# Altium PCB CAM_SEN_V100.PcbDoc
Units mm, origin at the board's own origin, x right, y up, seen from the top; angles counter-clockwise.
Board outline 28.5 x 47.5 mm, 2 copper layers (Top Layer, Bottom Layer); 74 components, 38 nets, 500 pads, 0 vias.
Unrouted connection lines stored in the file: 374.
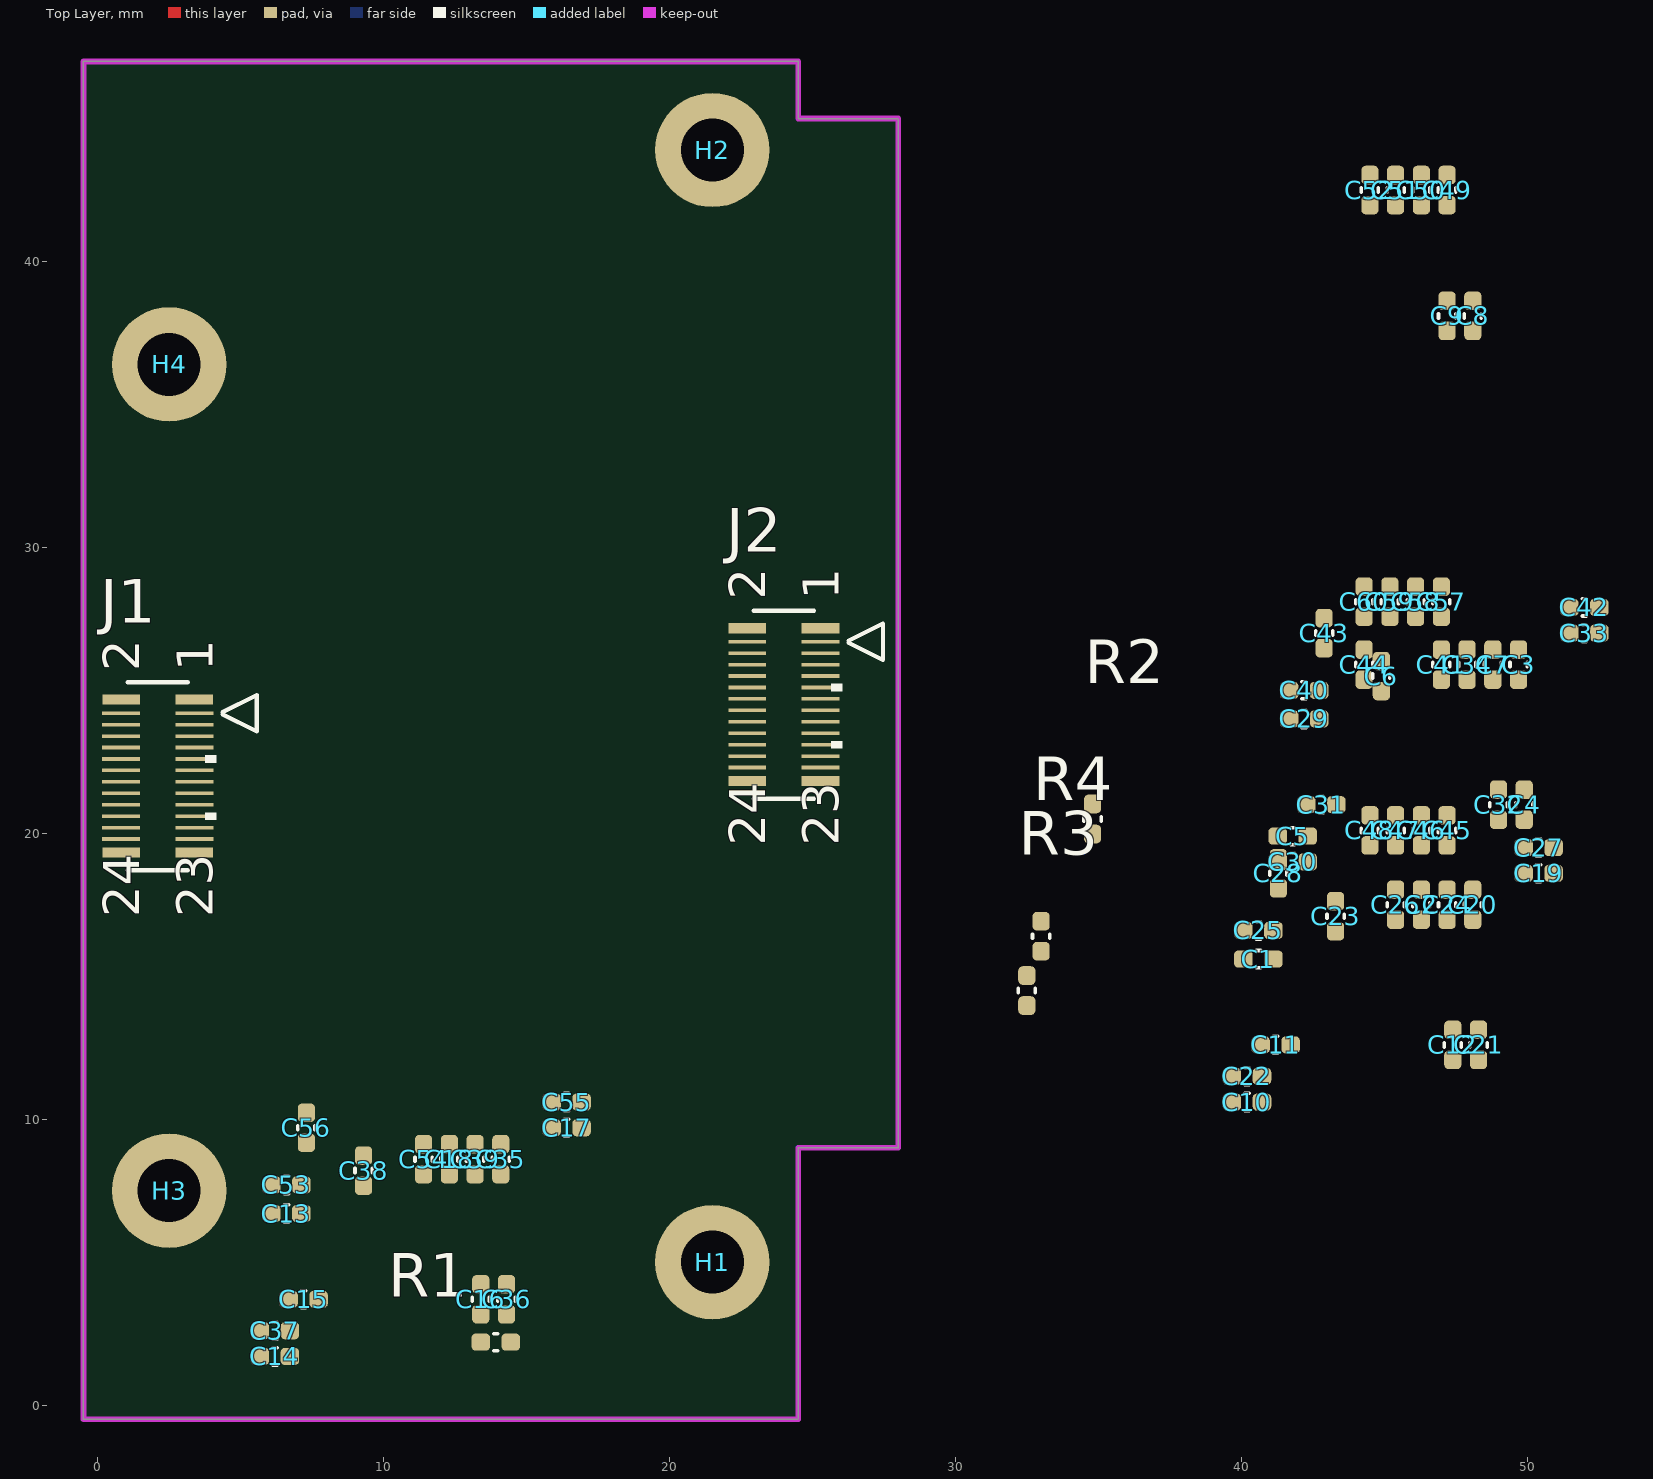
[diagram p0: Top Layer view]
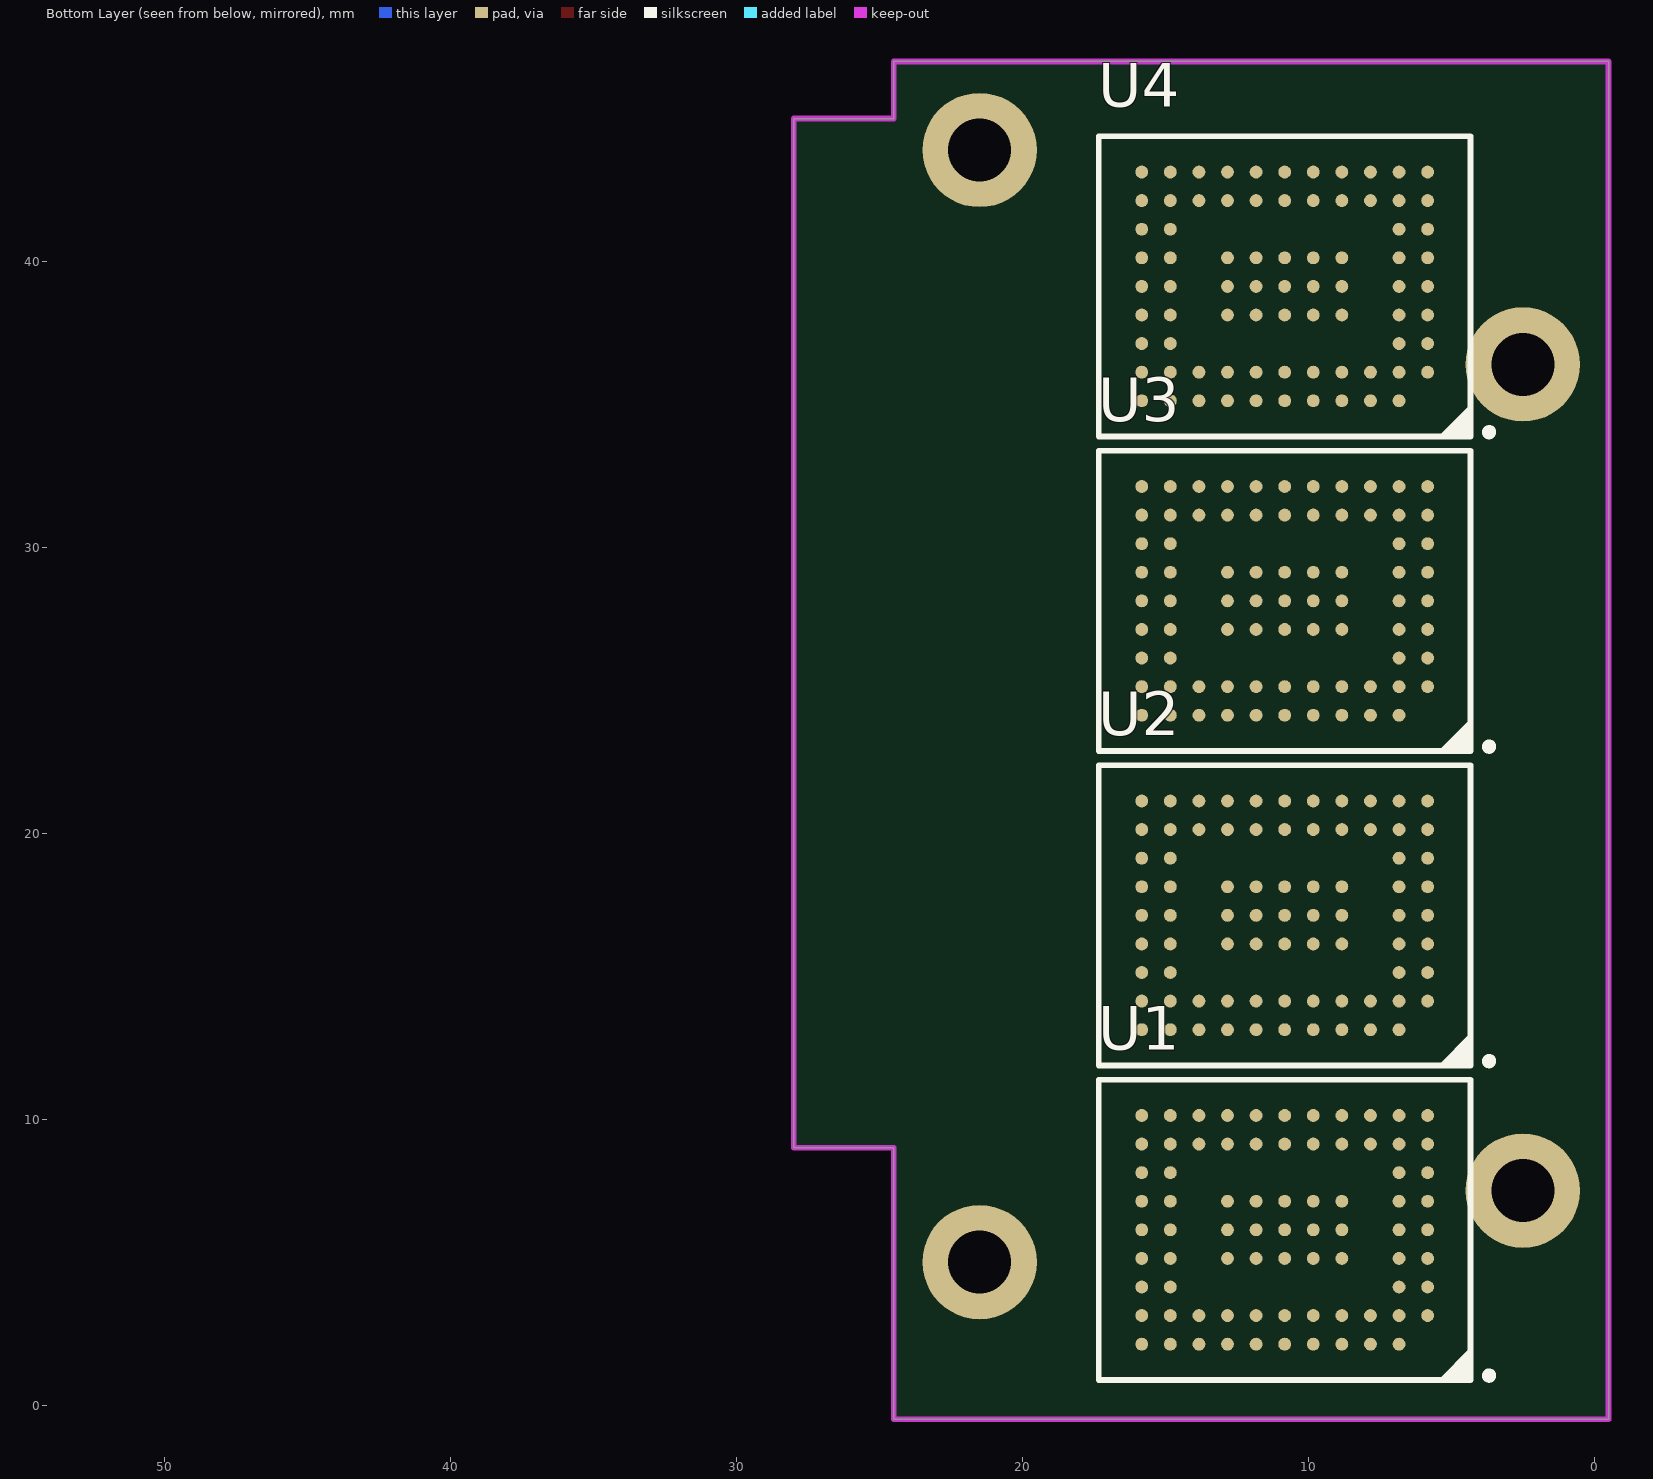
[diagram p1: Bottom Layer view, seen from below]

## Layer stack, top to bottom
Top Solder: solder mask 0.0102, Solder Resist, Dk 3.5
Top Layer: signal copper 0.0356
Dielectric 1: dielectric 0.32, FR-4, Dk 4.8
Bottom Layer: signal copper 0.0356
Bottom Solder: solder mask 0.0102, Solder Resist, Dk 3.5

## Board outline
-0.5,-0.5 -0.5,47 24.5,47 24.5,45 28,45 28,9 24.5,9 24.5,-0.5

## Design rules (kind name [scope] priority, off if disabled: settings)
Clearance [All] p1: gap=0.15 ignorepadtopadclearanceinfootprint=FALSE
DiffPairsRouting [All] p1: maxlimit=0.254 minlimit=0.254 mostfreqgap=0.254 toplayer_minwidth=0.381 toplayer_maxwidth=0.381 toplayer_prefwidth=0.381 bottomlayer_minwidth=0.381 bottomlayer_maxwidth=0.381 bottomlayer_prefwidth=0.381 maxuncoupledlength=12.7
PolygonConnect [All] p1: connectstyle=Relief reliefconductorwidth=0.254 reliefentries=4 polygonreliefangle="90 Angle" airgapwidth=0.254
RoutingVias [All] p1: holewidth=0.711 width=1.27 viastyle="Through Hole" minholewidth=0.711 minwidth=1.27 maxholewidth=0.711 maxwidth=1.27
SolderMaskExpansion [All] p1: expansion=0.102 istentingtop=FALSE
SupplyNets "Schematic Supply Nets_6" [InNet('GND')] p1: voltage=0.000
SupplyNets "Schematic Supply Nets_5" [InNet('+1.05V')] p2: voltage=0.000
SupplyNets "Schematic Supply Nets_3" [InNet('+1.8V')] p3: voltage=0.000
SupplyNets "Schematic Supply Nets_1" [InNet('+2.8V')] p4: voltage=0.000
Width [All] p1: maxlimit=0.254 minlimit=0.254 preferedwidth=0.254
29 further rules are at their usual default settings.

## Classes and differential pairs
net class DIFF100: CAM_CK_N CAM_CK_P CAM_D0_N CAM_D0_P CAM_D1_N CAM_D1_P
component class POWER: C1 C2 C3 C4 C5 C6 C7 C8 C9 C10 C11 C12 C13 C14 C15 C16 C17 C18 C19 C20 C21 C22 C23 C24 C25 C26 C28 C30 C32 C34 C35 C36 C37 C38 C39 C40 C41 C42 C43 C44 C47 C49 C50 C51 C52 C53 C54 C55 C56 C57 C58 C59 H1 H2 H3 H4 J1 J2 R1 R2 R3 R4 U1 U2 U3 U4
differential pair CAM_D1: +CAM_D1_P -CAM_D1_N
differential pair CAM_D0: +CAM_D0_P -CAM_D0_N
differential pair CAM_CK: +CAM_CK_P -CAM_CK_N

## Components (designator, comment, footprint, x,y, rotation, side; value= is the part's Value field where it differs from the comment)
C1 "2.2uF/6.3V" CAP_C_1005X60 40.6,15.6 r180 top value=33pF
C2 "2.2uF/6.3V" CAP_C_1005X60 46.3,17.5 r90 top value=33pF
C3 "2.2uF/6.3V" CAP_C_1005X60 49.7,25.9 r90 top value=33pF
C4 "2.2uF/6.3V" CAP_C_1005X60 49.9,21 r270 top value=33pF
C5 "2.2uF/6.3V" CAP_C_1005X60 41.8,19.9 r0 top value=33pF
C6 "0.22uF/16V" CAP_C_1005X60 44.9,25.5 r90 top value=33pF
C7 "2.2uF/6.3V" CAP_C_1005X60 48.8,25.9 r90 top value=33pF
C8 "2.2uF/6.3V" CAP_C_1005X60 48.1,38.1 r90 top value=33pF
C9 "2.2uF/6.3V" CAP_C_1005X60 47.2,38.1 r90 top value=33pF
C10 "2.2uF/6.3V" CAP_C_1005X60 40.2,10.6 r0 top value=33pF
C11 "2.2uF/6.3V" CAP_C_1005X60 41.2,12.6 r0 top value=33pF
C12 "0.22uF/16V" CAP_C_1005X60 47.4,12.6 r270 top value=33pF
C13 "2.2uF/6.3V" CAP_C_1005X60 6.6,6.7 r180 top value=33pF
C14 "2.2uF/6.3V" CAP_C_1005X60 6.2,1.7 r0 top value=33pF
C15 "2.2uF/6.3V" CAP_C_1005X60 7.2,3.7 r0 top value=33pF
C16 "2.2uF/6.3V" CAP_C_1005X60 13.4,3.7 r270 top value=33pF
C17 "2.2uF/6.3V" CAP_C_1005X60 16.4,9.7 r180 top value=33pF
C18 "0.22uF/16V" CAP_C_1005X60 12.3,8.6 r90 top value=33pF
C19 "2.2uF/6.3V" CAP_C_1005X60 50.4,18.6 r180 top value=33pF
C20 "2.2uF/6.3V" CAP_C_1005X60 48.1,17.5 r90 top value=33pF
C21 "2.2uF/6.3V" CAP_C_1005X60 48.3,12.6 r270 top value=33pF
C22 "2.2uF/6.3V" CAP_C_1005X60 40.2,11.5 r0 top value=33pF
C23 "2.2uF/6.3V" CAP_C_1005X60 43.3,17.1 r90 top value=33pF
C24 "0.22uF/16V" CAP_C_1005X60 47.2,17.5 r90 top value=33pF
C25 "2.2uF/6.3V" CAP_C_1005X60 40.6,16.6 r180 top value=33pF
C26 "2.2uF/6.3V" CAP_C_1005X60 45.4,17.5 r90 top value=33pF
C27 "2.2uF/6.3V" CAP_C_1005X60 50.4,19.5 r180 top value=33pF
C28 "2.2uF/6.3V" CAP_C_1005X60 41.3,18.6 r90 top value=33pF
C29 "0.22uF/16V" CAP_C_1005X60 42.2,24 r180 top value=33pF
C30 "2.2uF/6.3V" CAP_C_1005X60 41.8,19 r0 top value=33pF
C31 "2.2uF/6.3V" CAP_C_1005X60 42.8,21 r0 top value=33pF
C32 "2.2uF/6.3V" CAP_C_1005X60 49,21 r270 top value=33pF
C33 "2.2uF/6.3V" CAP_C_1005X60 52,27 r180 top value=33pF
C34 "0.22uF/16V" CAP_C_1005X60 47.9,25.9 r90 top value=33pF
C35 "2.2uF/6.3V" CAP_C_1005X60 14.1,8.6 r90 top value=33pF
C36 "2.2uF/6.3V" CAP_C_1005X60 14.3,3.7 r270 top value=33pF
C37 "2.2uF/6.3V" CAP_C_1005X60 6.2,2.6 r0 top value=33pF
C38 "2.2uF/6.3V" CAP_C_1005X60 9.3,8.2 r90 top value=33pF
C39 "0.22uF/16V" CAP_C_1005X60 13.2,8.6 r90 top value=33pF
C40 "2.2uF/6.3V" CAP_C_1005X60 42.2,25 r180 top value=33pF
C41 "2.2uF/6.3V" CAP_C_1005X60 47,25.9 r90 top value=33pF
C42 "2.2uF/6.3V" CAP_C_1005X60 52,27.9 r180 top value=33pF
C43 "2.2uF/6.3V" CAP_C_1005X60 42.9,27 r90 top value=33pF
C44 "0.22uF/16V" CAP_C_1005X60 44.3,25.9 r90 top value=33pF
C45 "2.2uF/6.3V" CAP_C_1005X60 47.2,20.1 r90 top value=33pF
C46 "2.2uF/6.3V" CAP_C_1005X60 46.3,20.1 r90 top value=33pF
C47 "2.2uF/6.3V" CAP_C_1005X60 45.4,20.1 r90 top value=33pF
C48 "0.22uF/16V" CAP_C_1005X60 44.5,20.1 r90 top value=33pF
C49 "2.2uF/6.3V" CAP_C_1005X60 47.2,42.5 r90 top value=33pF
C50 "2.2uF/6.3V" CAP_C_1005X60 46.3,42.5 r90 top value=33pF
C51 "2.2uF/6.3V" CAP_C_1005X60 45.4,42.5 r90 top value=33pF
C52 "0.22uF/16V" CAP_C_1005X60 44.5,42.5 r90 top value=33pF
C53 "2.2uF/6.3V" CAP_C_1005X60 6.6,7.7 r180 top value=33pF
C54 "2.2uF/6.3V" CAP_C_1005X60 11.4,8.6 r90 top value=33pF
C55 "2.2uF/6.3V" CAP_C_1005X60 16.4,10.6 r180 top value=33pF
C56 "0.22uF/16V" CAP_C_1005X60 7.3,9.7 r90 top value=33pF
C57 "2.2uF/6.3V" CAP_C_1005X60 47,28.1 r90 top value=33pF
C58 "2.2uF/6.3V" CAP_C_1005X60 46.1,28.1 r90 top value=33pF
C59 "2.2uF/6.3V" CAP_C_1005X60 45.2,28.1 r90 top value=33pF
C60 "0.22uF/16V" CAP_C_1005X60 44.3,28.1 r90 top value=33pF
H1 "M2" HEX-2.2mm 21.5,5 r0 top locked
H2 "M2" HEX-2.2mm 21.5,43.9 r0 top locked
H3 "M2" HEX-2.2mm 2.5,7.5 r0 top locked
H4 "M2" HEX-2.2mm 2.5,36.4 r0 top locked
J1 "DF40C-24DP-0.4V51" CONN24_6p32X1p85_hdr_HIR 2.1,22 r90 top
J2 "DF40C-24DP-0.4V51" CONN24_6p32X1p85_hdr_HIR 24,24.5 r90 top
R1 "4.7k" RES_C_1005X40 13.925,2.2 r180 top
R2 "4.7k" RES_C_1005X40 34.8,20.5 r90 top
R3 "4.7k" RES_C_1005X40 32.5,14.5 r90 top
R4 "4.7k" RES_C_1005X40 33,16.4 r90 top
U1 "AR2020" BGA78C100P11X9_1300X1050X210 10.83,6.13 r0 bottom locked
U2 "AR2020" BGA78C100P11X9_1300X1050X210 10.83,17.13 r0 bottom locked
U3 "AR2020" BGA78C100P11X9_1300X1050X210 10.83,28.13 r0 bottom locked
U4 "AR2020" BGA78C100P11X9_1300X1050X210 10.83,39.13 r0 bottom locked

## Footprints (in the part's own frame and the unit in brackets; to place one, negate y for a bottom-side part, rotate by r counter-clockwise, add the part's x,y. Pads: shape width x height; smd on the part's side, far side on the other; paste and mask are expansions set on the pad)
BGA78C100P11X9_1300X1050X210 [mm] "BGA, 78-Leads, Body 13.00x10.50mmx2.10mm, Pitch 1.00mm"
  round 0.45 smd: A2(-4,4) A3(-3,4) A4(-2,4) A5(-1,4) A6(0,4) A7(1,4) A8(2,4) A9(3,4) A10(4,4) A11(5,4) B1(-5,3) B2(-4,3) B3(-3,3) B4(-2,3) B5(-1,3) B6(0,3) B7(1,3) B8(2,3) B9(3,3) B10(4,3) B11(5,3) C1(-5,2) C2(-4,2) C10(4,2) C11(5,2) D1(-5,1) D2(-4,1) D4(-2,1) D5(-1,1) D6(0,1) D7(1,1) D8(2,1) D10(4,1) D11(5,1) E1(-5,0) E2(-4,0) E4(-2,0) E5(-1,0) E6(0,0) E7(1,0) E8(2,0) E10(4,0) E11(5,0) F1(-5,-1) F2(-4,-1) F4(-2,-1) F5(-1,-1) F6(0,-1) F7(1,-1) F8(2,-1) F10(4,-1) F11(5,-1) G1(-5,-2) G2(-4,-2) G10(4,-2) G11(5,-2) H1(-5,-3) H2(-4,-3) H3(-3,-3) H4(-2,-3) H5(-1,-3) H6(0,-3) H7(1,-3) H8(2,-3) H9(3,-3) H10(4,-3) H11(5,-3) J1(-5,-4) J2(-4,-4) J3(-3,-4) J4(-2,-4) J5(-1,-4) J6(0,-4) J7(1,-4) J8(2,-4) J9(3,-4) J10(4,-4) J11(5,-4)
  silkscreen extent -7.27,-5.25 6.5,5.25, body extent -6.5,-5.25 6.5,5.25, height 2.1
CAP_C_1005X60 [mm]
  rrect50% 0.65x0.6 smd mask+0.05: 1(-0.525,0) 2(0.525,0)
  silkscreen extent -0.08,-0.3 0.08,0.3, body extent -0.5,-0.27 0.5,0.26, height 0.35
CONN24_6p32X1p85_hdr_HIR [mil]
  rect 5x52 smd paste+0 mask+0: 1(86.61,-50.5) 2(86.61,50.5) 3(70.87,-50.5) 4(70.87,50.5) 5(55.12,-50.5) 6(55.12,50.5) 7(39.37,-50.5) 8(39.37,50.5) 9(23.62,-50.5) 10(23.62,50.5) 11(7.87,-50.5) 12(7.87,50.5) 13(-7.87,-50.5) 14(-7.87,50.5) 15(-23.62,-50.5) 16(-23.62,50.5) 17(-39.37,-50.5) 18(-39.37,50.5) 19(-55.12,-50.5) 20(-55.12,50.5) 21(-70.87,-50.5) 22(-70.87,50.5) 23(-86.61,-50.5) 24(-86.61,50.5)
  rect 14x52 smd paste-26 mask-26: 25(-105.31,50.35) 26(105.31,50.35) 27(-105.31,-50.35) 28(105.31,-50.35)
  silkscreen extent -130,-137 130,42, body extent -124,-58 124,58, height 45
HEX-2.2mm [mm]
  round 4 hole 2.2: 1(0,0)
RES_C_1005X40 [mm]
  rrect50% 0.65x0.6 smd mask+0.05: 1(-0.525,0) 2(0.525,0)
  silkscreen extent -0.08,-0.3 0.08,0.3, body extent -0.5,-0.25 0.5,0.25, height 0.38

## Part data
C1 C2 C3 C4 C5 C6 C7 C8 C9 C10 C11 C12 C13 C14 C15 C16 C17 C18 C19 C20 C21 C22 C23 C24 C25 C26 C27 C28 C29 C30 C31 C32 C33 C34 C35 C36 C37 C38 C39 C40 C41 C42 C43 C44 C45 C46 C47 C48 C49 C50 C51 C52 C53 C54 C55 C56 C57 C58 C59 C60: library part CAP_SMD, "CAP_Chip"
H1 H2 H3 H4: library part HEX-M3
J1 J2: "No Description Available", Mfr_Name=Hirose, RefDes=RefDes, Type=Type
R1 R2 R3 R4: library part RES-SMD, "RES-Chip", Manufacturer="Generic Components", Class=Passive, Published=08/06/2000, Publisher="Altium Hobart Technology Centre"

## Nets (pads, with @x,y where several pads share a name; then routed paths per layer and width w, separated by ;. In a path a pad name is that pad's centre, name@x,y a point inside that pad or via, vN(x,y) a via of type N, cw(c..) or ccw(c..) an arc to the next point about the centre after c; other vN are vias at no path point)
+1.05V: C1.2 C2.2 C3.2 C4.2 C5.2 C6.2 C7.2 C8.2 C9.2 C10.2 C11.2 C12.2 C13.2 C14.2 C15.2 C16.2 C17.2 C18.2 C19.2 C20.2 C21.2 C22.2 C23.2 C24.2 J1.5 J1.7 U1.A2 U1.B3 U1.B9 U1.B11 U1.F1 U1.H7 U1.H11 U1.J10 U2.A2 U2.B3 U2.B9 U2.B11 U2.F1 U2.H7 U2.H11 U2.J10 U3.A2 U3.B3 U3.B9 U3.B11 U3.F1 U3.H7 U3.H11 U3.J10 U4.A2 U4.B3 U4.B9 U4.B11 U4.F1 U4.H7 U4.H11 U4.J10
+1.8V: C25.2 C26.2 C27.2 C28.2 C29.2 C30.2 C31.2 C32.2 C33.2 C34.2 C35.2 C36.2 C37.2 C38.2 C39.2 C40.2 C41.2 C42.2 C43.2 C44.2 J1.1 J1.3 R1.2 R2.2 R3.2 R4.2 U1.B2 U1.B10 U1.H1 U1.H4 U1.H8 U1.H9 U2.B2 U2.B10 U2.H1 U2.H4 U2.H8 U2.H9 U3.B2 U3.B10 U3.H1 U3.H4 U3.H8 U3.H9 U4.B2 U4.B10 U4.H1 U4.H4 U4.H8 U4.H9
+2.8V: C45.2 C46.2 C47.2 C48.2 C49.2 C50.2 C51.2 C52.2 C53.2 C54.2 C55.2 C56.2 C57.2 C58.2 C59.2 C60.2 J1.2 J1.4 U1.G1 U1.J2 U1.J3 U1.J7 U1.J9 U2.G1 U2.J2 U2.J3 U2.J7 U2.J9 U3.G1 U3.J2 U3.J3 U3.J7 U3.J9 U4.G1 U4.J2 U4.J3 U4.J7 U4.J9
CAM_CK_N: J2.4 U1.B6 U2.B6 U3.B6 U4.B6
CAM_CK_P: J2.2 U1.A6 U2.A6 U3.A6 U4.A6
CAM_D0_N: J2.10 U1.B8 U2.B8 U3.B8 U4.B8
CAM_D0_P: J2.8 U1.A8 U2.A8 U3.A8 U4.A8
CAM_D1_N: J2.16 U1.B7 U2.B7 U3.B7 U4.B7
CAM_D1_P: J2.14 U1.A7 U2.A7 U3.A7 U4.A7
GND: C1.1 C2.1 C3.1 C4.1 C5.1 C6.1 C7.1 C8.1 C9.1 C10.1 C11.1 C12.1 C13.1 C14.1 C15.1 C16.1 C17.1 C18.1 C19.1 C20.1 C21.1 C22.1 C23.1 C24.1 C25.1 C26.1 C27.1 C28.1 C29.1 C30.1 C31.1 C32.1 C33.1 C34.1 C35.1 C36.1 C37.1 C38.1 C39.1 C40.1 C41.1 C42.1 C43.1 C44.1 C45.1 C46.1 C47.1 C48.1 C49.1 C50.1 C51.1 C52.1 C53.1 C54.1 C55.1 C56.1 C57.1 C58.1 C59.1 C60.1 J1.6 J1.8 J1.23 J1.24 J2.6 J2.12 J2.15 J2.18 U1.A11 U1.B1 U1.C2 U1.D4 U1.D5 U1.D6 U1.D7 U1.D8 U1.E4 U1.E5 U1.E6 U1.E7 U1.E8 U1.F2 U1.F4 U1.F5 U1.F6 U1.F7 U1.F8 U1.G2 U1.H2 U1.H3 U1.H5 U1.J1 U1.J4 U1.J5 U1.J11 U2.A11 U2.B1 U2.C2 U2.D4 U2.D5 U2.D6 U2.D7 U2.D8 U2.E4 U2.E5 U2.E6 U2.E7 U2.E8 U2.F2 U2.F4 U2.F5 U2.F6 U2.F7 U2.F8 U2.G2 U2.H2 U2.H3 U2.H5 U2.J1 U2.J4 U2.J5 U2.J11 U3.A11 U3.B1 U3.C2 U3.D4 U3.D5 U3.D6 U3.D7 U3.D8 U3.E4 U3.E5 U3.E6 U3.E7 U3.E8 U3.F2 U3.F4 U3.F5 U3.F6 U3.F7 U3.F8 U3.G2 U3.H2 U3.H3 U3.H5 U3.J1 U3.J4 U3.J5 U3.J11 U4.A11 U4.B1 U4.C2 U4.D4 U4.D5 U4.D6 U4.D7 U4.D8 U4.E4 U4.E5 U4.E6 U4.E7 U4.E8 U4.F2 U4.F4 U4.F5 U4.F6 U4.F7 U4.F8 U4.G2 U4.H2 U4.H3 U4.H5 U4.J1 U4.J4 U4.J5 U4.J11
SEN_0_CLK: J1.9 U1.A9
SEN_0_GPIO0: J1.15 U1.D1
SEN_0_GPIO1: J1.17 U1.D2
SEN_0_GPIO2: J1.19 U1.E1
SEN_0_nOFF: J1.21 R1.1 U1.A10
SEN_0_SCL: J1.11 U1.J6
SEN_0_SDA: J1.13 U1.H6
SEN_1_CLK: J1.10 U2.A9
SEN_1_GPIO0: J1.16 U2.D1
SEN_1_GPIO1: J1.18 U2.D2
SEN_1_GPIO2: J1.20 U2.E1
SEN_1_nOFF: J1.22 R2.1 U2.A10
SEN_1_SCL: J1.12 U2.J6
SEN_1_SDA: J1.14 U2.H6
SEN_2_CLK: J2.1 U3.A9
SEN_2_GPIO0: J2.7 U3.D1
SEN_2_GPIO1: J2.9 U3.D2
SEN_2_GPIO2: J2.11 U3.E1
SEN_2_nOFF: J2.13 R3.1 U3.A10
SEN_2_SCL: J2.3 U3.J6
SEN_2_SDA: J2.5 U3.H6
SEN_3_CLK: J2.20 U4.A9
SEN_3_GPIO0: J2.17 U4.D1
SEN_3_GPIO1: J2.19 U4.D2
SEN_3_GPIO2: J2.21 U4.E1
SEN_3_nOFF: J2.23 R4.1 U4.A10
SEN_3_SCL: J2.22 U4.J6
SEN_3_SDA: J2.24 U4.H6
pads on no net: H1.1 H2.1 H3.1 H4.1 J1.25 J1.26 J1.27 J1.28 J2.25 J2.26 J2.27 J2.28 U1.A3 U1.A4 U1.A5 U1.B4 U1.B5 U1.C1 U1.C10 U1.C11 U1.D10 U1.D11 U1.E2 U1.E10 U1.E11 U1.F10 U1.F11 U1.G10 U1.G11 U1.H10 U1.J8 U2.A3 U2.A4 U2.A5 U2.B4 U2.B5 U2.C1 U2.C10 U2.C11 U2.D10 U2.D11 U2.E2 U2.E10 U2.E11 U2.F10 U2.F11 U2.G10 U2.G11 U2.H10 U2.J8 U3.A3 U3.A4 U3.A5 U3.B4 U3.B5 U3.C1 U3.C10 U3.C11 U3.D10 U3.D11 U3.E2 U3.E10 U3.E11 U3.F10 U3.F11 U3.G10 U3.G11 U3.H10 U3.J8 U4.A3 U4.A4 U4.A5 U4.B4 U4.B5 U4.C1 U4.C10 U4.C11 U4.D10 U4.D11 U4.E2 U4.E10 U4.E11 U4.F10 U4.F11 U4.G10 U4.G11 U4.H10 U4.J8

## Keep-outs
Keep-Out Layer:
  the board outline again, w0.2

## Text inside footprints (layer, text, board x,y; h text height)
J1: Top Overlay "23" at 4.018,17.06 h1.27 r90; Top Overlay "24" at 1.452,17.06 h1.27 r90; Top Overlay "1" at 4.018,25.67 h1.27 r90; Top Overlay "2" at 1.452,25.67 h1.27 r90; Mechanical 13 "23" at 4.018,17.06 h1.27 r90; Mechanical 13 "24" at 1.452,17.06 h1.27 r90; Mechanical 13 "1" at 4.018,25.67 h1.27 r90; Mechanical 13 "2" at 1.452,25.67 h1.27 r90
J2: Top Overlay "23" at 25.918,19.56 h1.27 r90; Top Overlay "24" at 23.352,19.56 h1.27 r90; Top Overlay "1" at 25.918,28.17 h1.27 r90; Top Overlay "2" at 23.352,28.17 h1.27 r90; Mechanical 13 "23" at 25.918,19.56 h1.27 r90; Mechanical 13 "24" at 23.352,19.56 h1.27 r90; Mechanical 13 "1" at 25.918,28.17 h1.27 r90; Mechanical 13 "2" at 23.352,28.17 h1.27 r90